# Altium PCB VNA_CHANNEL3.PcbDoc (part 1 of 3)
Units mm, origin at the board's own origin, x right, y up, seen from the top; angles counter-clockwise.
Board outline 32.68 x 75 mm, 4 copper layers (Top Layer, GND, PWR, Bottom Layer), stack 0.758 mm thick; 209 components, 187 nets, 832 pads, 833 vias.
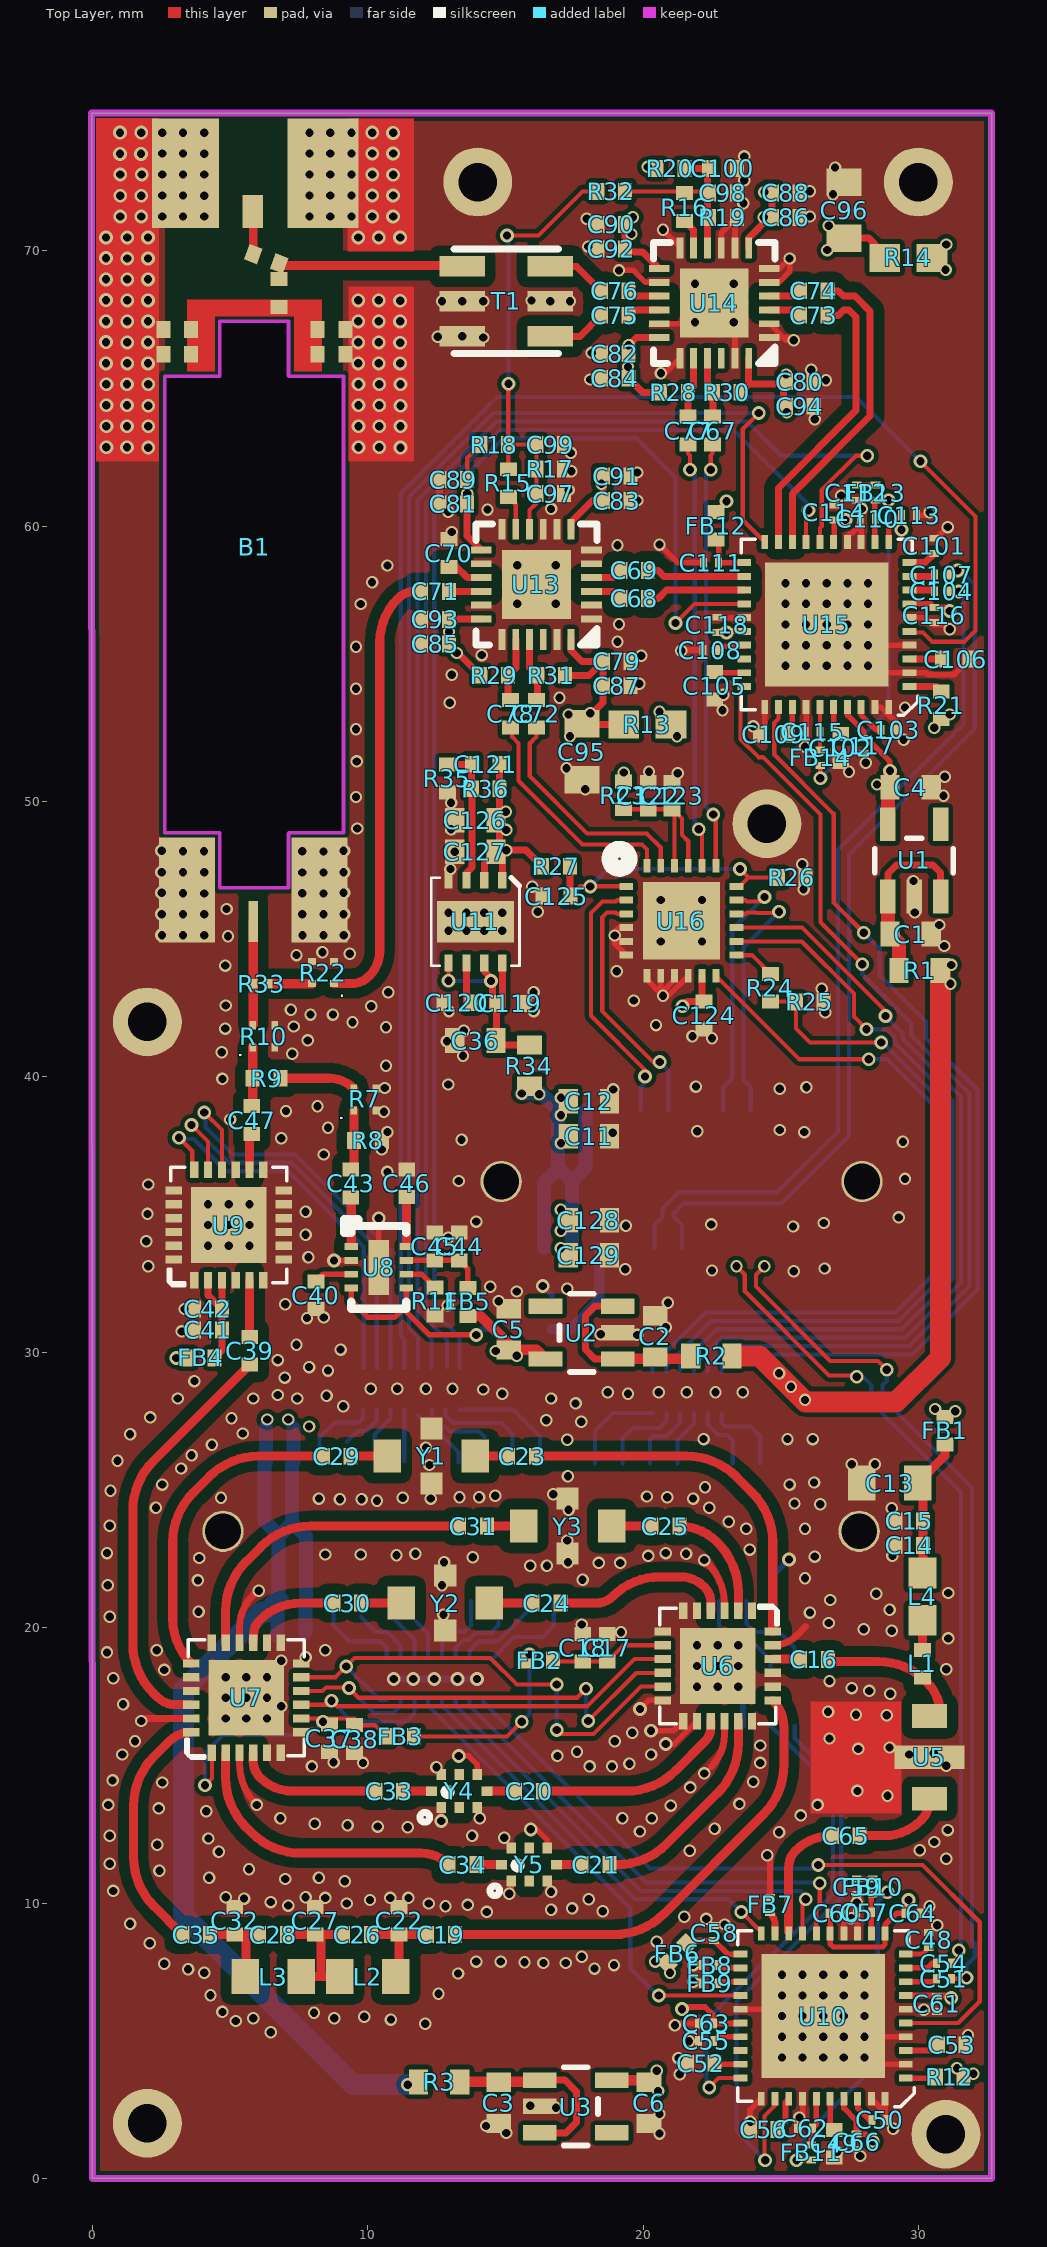
[diagram p0: Top Layer view]
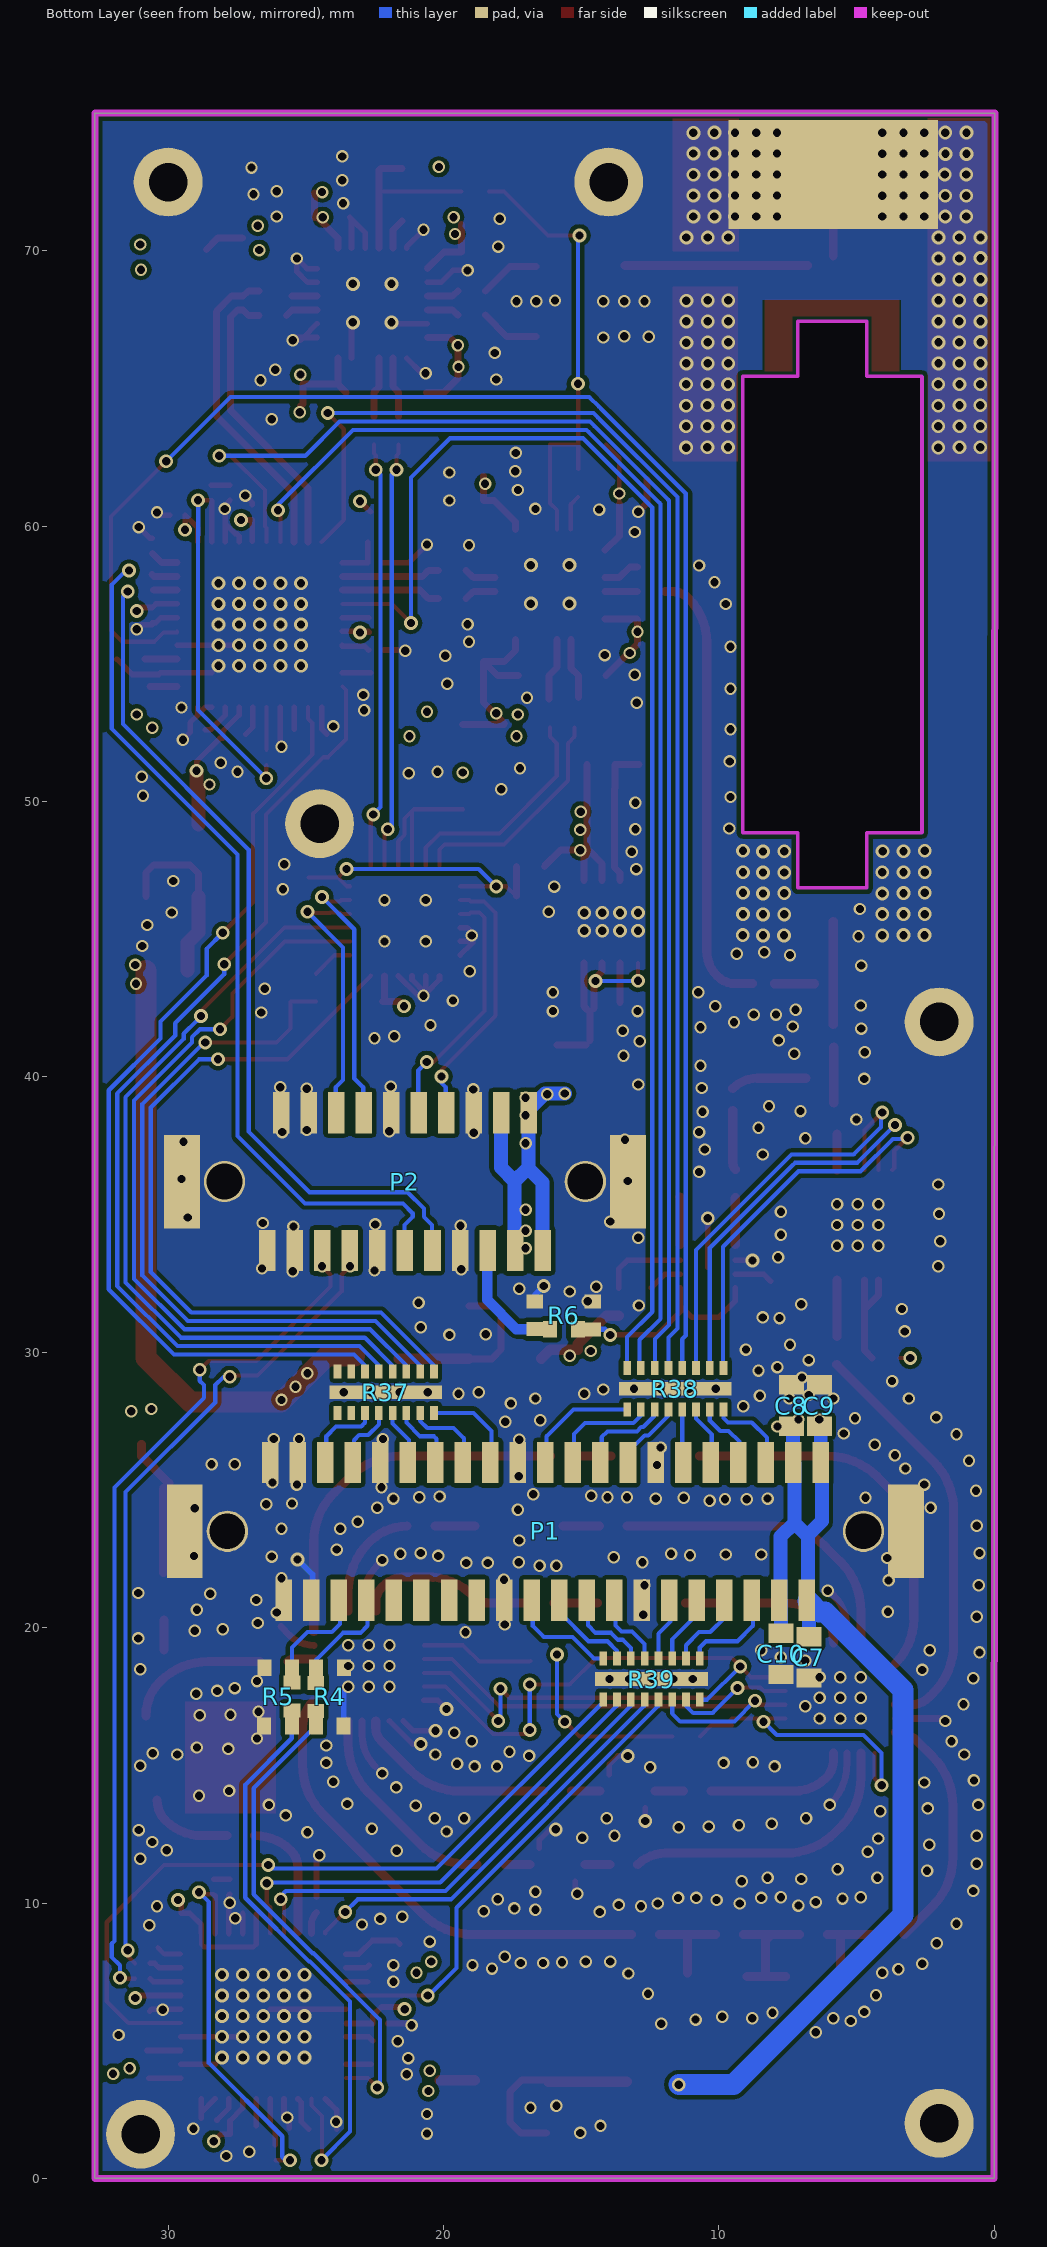
[diagram p1: Bottom Layer view, seen from below]
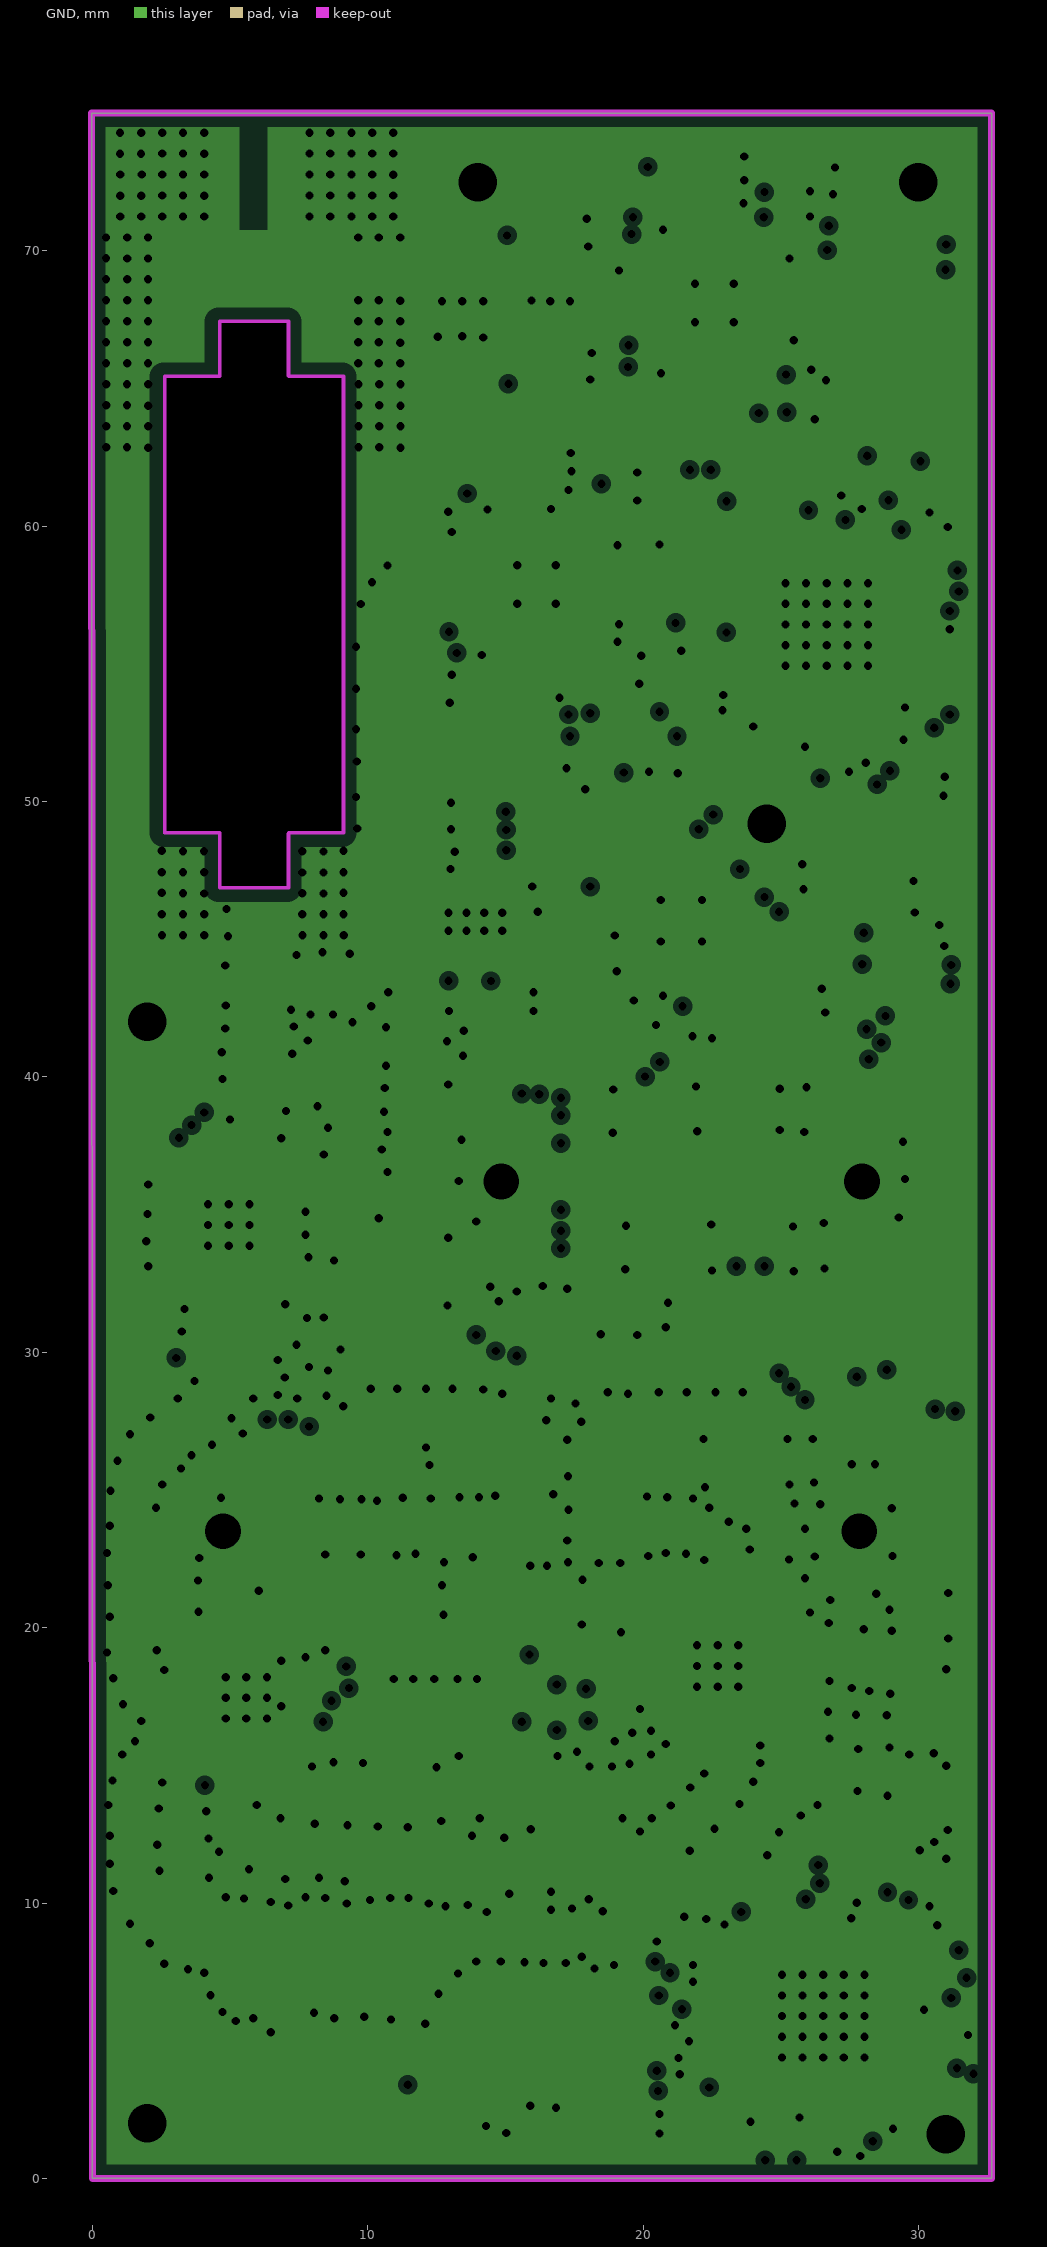
[diagram p2: GND, clearances drawn from the general rule]
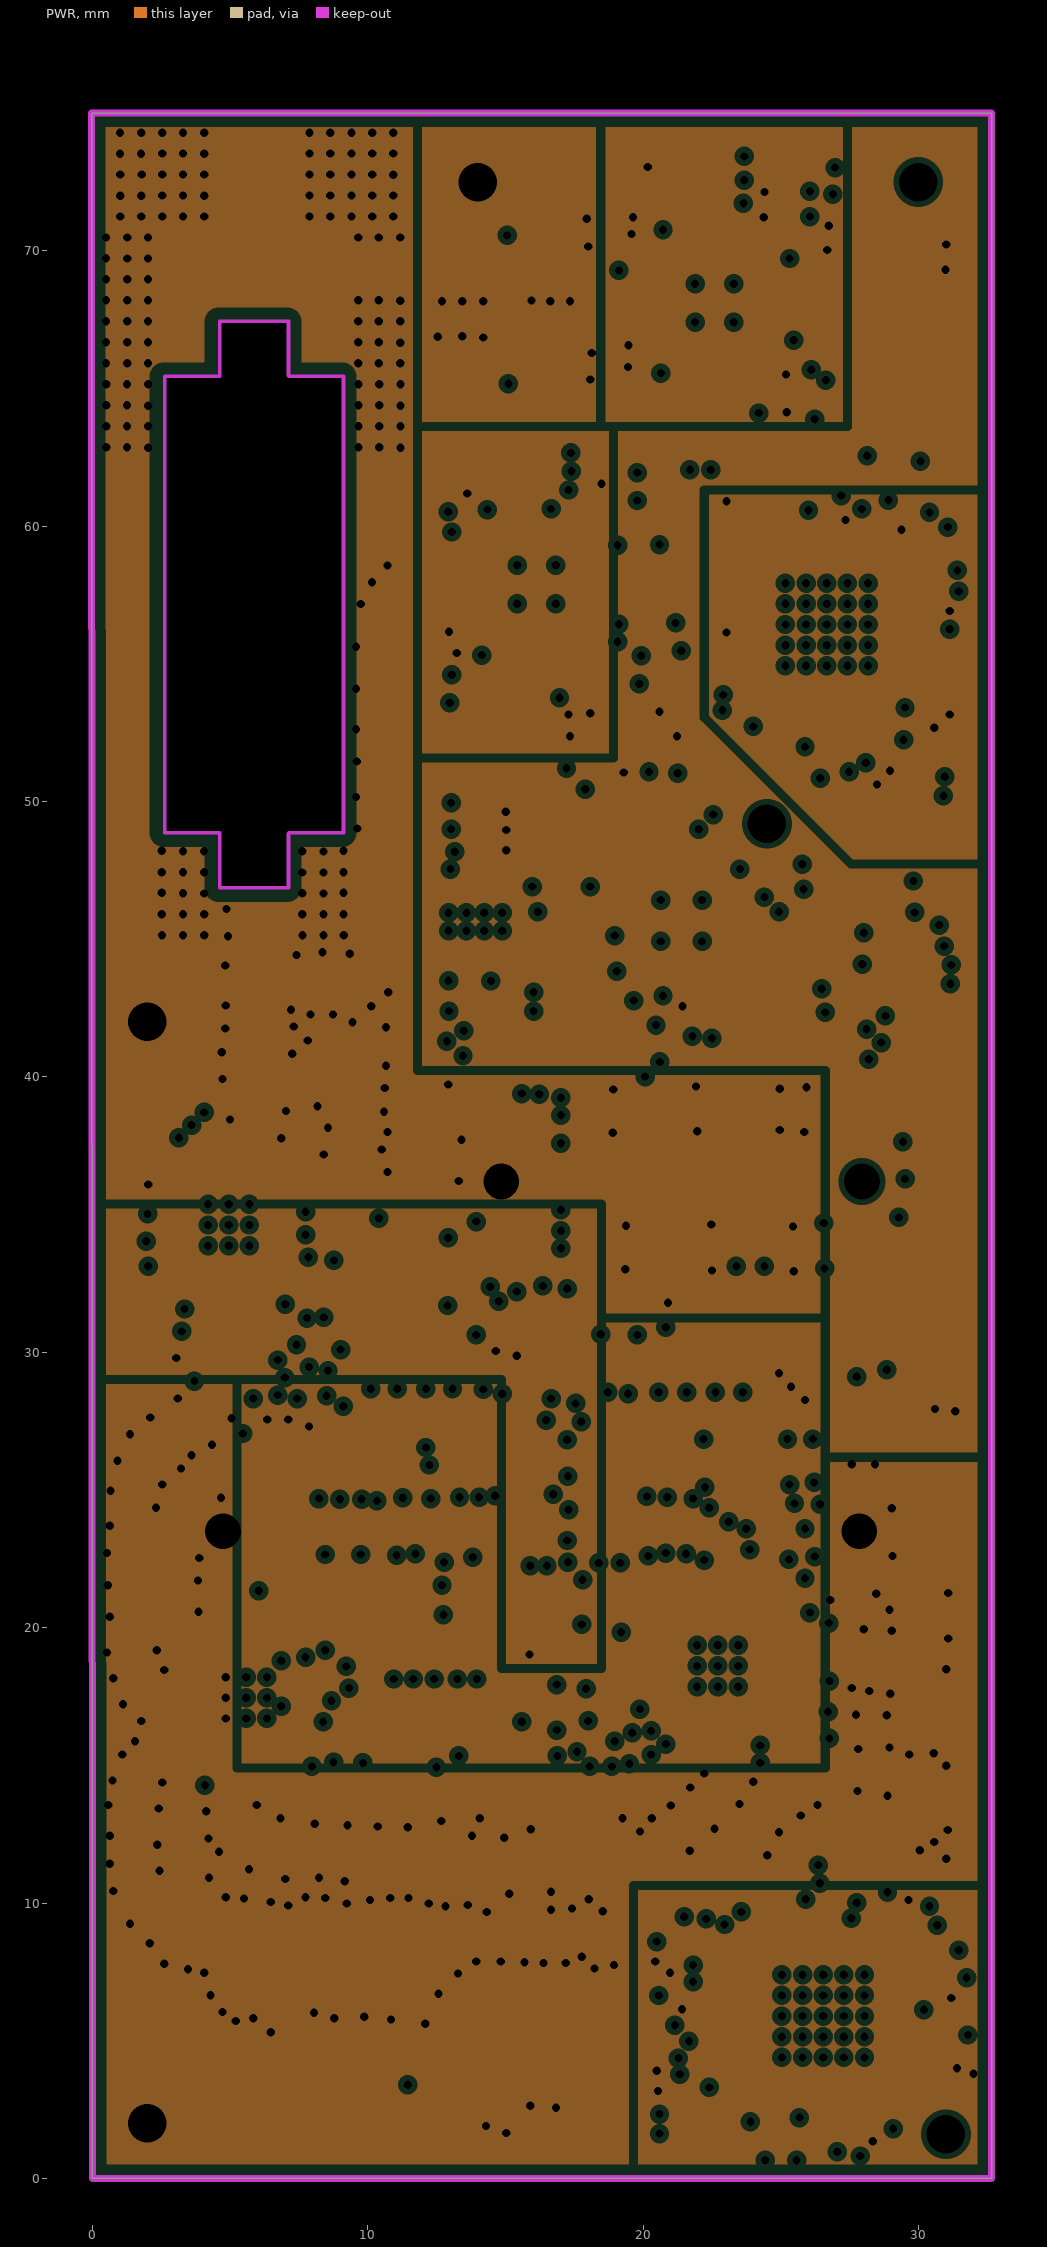
[diagram p3: PWR, clearances drawn from the general rule]

## Layer stack, top to bottom
Top Solder: solder mask 0.0102, Solder Resist, Dk 3.8
Top Layer: signal copper 0.0356
Dielectric 1: prepreg 0.1803, Dk 4.6
GND: plane copper 0.036, net GND
Dielectric 3: core 0.254, Dk 4.6
PWR: plane copper 0.036, net (Multiple Nets)
Dielectric 4: prepreg 0.1803, Dk 4.6
Bottom Layer: signal copper 0.0356
Bottom Solder: solder mask 0.0102, Solder Resist, Dk 3.8

## Board outline
0,0 -0.025,74.999 -0.009,74.999 32.659,74.999 32.659,0

## Design rules (kind name [scope] priority, off if disabled: settings)
Clearance 50R [InNetClass('50R') vs InPolygon] p1: gap=0.381 ignorepadtopadclearanceinfootprint=FALSE
Clearance [All] p2: gap=0.152 ignorepadtopadclearanceinfootprint=FALSE except(0: Arc-Hole Track-Hole SMDPad-Hole THPad-Hole Via-Hole Fill-Hole Poly-Hole Region-Hole Text-Hole)
DiffPairsRouting [All] p1: maxlimit=0.254 minlimit=0.254 mostfreqgap=0.254 toplayer_minwidth=0.152 toplayer_maxwidth=0.381 toplayer_prefwidth=0.381 bottomlayer_minwidth=0.152 bottomlayer_maxwidth=0.381 bottomlayer_prefwidth=0.381 maxuncoupledlength=12.7
MinimumSolderMaskSliver [All] p1 off: minsoldermaskwidth=0.254
PlaneClearance [All] p1: clearance=0.203
PlaneConnect [All] p1: planeconnectstyle=Direct reliefexpansion=0.508 reliefentries=4 reliefconductorwidth=0.254 reliefairgap=0.254
PolygonConnect [All] p1: connectstyle=Direct reliefconductorwidth=0.254 reliefentries=4 polygonreliefangle="90 Angle" airgapwidth=0.254
RoomDefinition source [InComponentClass('source')] p1 off: confinementstyle=ConfineIn formatcopy=TRUE lockcomponents=FALSE outline 37.244,116.767 197.111,116.767 197.111,126.292 37.244,126.292
RoomDefinition LO [InComponentClass('LO')] p2 off: confinementstyle=ConfineIn formatcopy=TRUE lockcomponents=FALSE outline 37.244,88.726 195.816,88.726 195.816,98.251 37.244,98.251
RoomDefinition IF_AMP [InComponentClass('IF_AMP')] p3 off: confinementstyle=ConfineIn formatcopy=TRUE lockcomponents=FALSE outline 37.244,79.378 100.515,79.378 100.515,87.456 37.244,87.456
RoomDefinition filterbank_amp [InComponentClass('filterbank_amp')] p4 off: confinementstyle=ConfineIn formatcopy=TRUE lockcomponents=FALSE outline 37.244,69.523 356.826,69.523 356.826,78.108 37.244,78.108
RoomDefinition bridge [InComponentClass('bridge')] p5 off: confinementstyle=ConfineIn formatcopy=TRUE lockcomponents=FALSE outline 37.244,28.604 117.838,28.604 117.838,36.478 37.244,36.478
RoomDefinition connector [InComponentClass('connector')] p6 off: confinementstyle=ConfineIn formatcopy=TRUE lockcomponents=FALSE outline 37.244,46.054 52.179,46.054 52.179,76.584 37.244,76.584
RoomDefinition mixer [InComponentClass('mixer')] p7 off: confinementstyle=ConfineIn formatcopy=TRUE lockcomponents=FALSE outline 26.144,64.57 258.554,64.57 258.554,73.46 26.144,73.46
RoomDefinition power [InComponentClass('power')] p8 off: confinementstyle=ConfineIn formatcopy=TRUE lockcomponents=FALSE outline 26.271,56.315 78.468,56.315 78.468,63.3 26.271,63.3
RoutingVias [All] p1: holewidth=0.305 width=0.508 viastyle="Through Hole" minholewidth=0.3 minwidth=0.45 maxholewidth=0.711 maxwidth=1.27
SilkToBoardRegionClearance [All] p1 off:
SilkToSilkClearance [All] p1 off: silktosilkclearance=0.254
SilkToSolderMaskClearance [IsPad] p1 off: minsilkscreentomaskgap=0.254 clearancetoexposedcopper=TRUE
SolderMaskExpansion [All] p1: expansion=0.102
Width [All] p1: maxlimit=1.524 minlimit=0.152 preferedwidth=0.152
23 further rules are at their usual default settings.

## Classes and differential pairs
component class power: C1 C2 C3 C4 C5 C6 C36 C119 C120 C121 C126 C127 R1 R2 R3 R34 R35 R36 U1 U2 U3 U11
component class connector: C7 C8 C9 C10 C11 C12 C128 C129 P1 P2 R4 R5 R6 R37 R38 R39
component class bridge: B1 R22 R33
component class filterbank_amp: C13 C14 C15 C16 C17 C18 C19 C20 C21 C22 C23 C24 C25 C26 C27 C28 C29 C30 C31 C32 C33 C34 C35 C37 C38 C39 C40 C41 C42 C43 C44 C45 C46 C47 FB1 FB2 FB3 FB4 FB5 L1 L2 L3 L4 R7 R8 R9 R10 R11 U5 U6 U7 U8 U9 Y1 Y2 Y3 Y4 Y5
component class IF_AMP: C122 C123 C124 C125 R23 R24 R25 R26 R27 U16
component class LO: C101 C102 C103 C104 C105 C106 C107 C108 C109 C110 C111 C112 C113 C114 C115 C116 C117 C118 FB12 FB13 FB14 R21 U15
component class mixer: C67 C68 C69 C70 C71 C72 C73 C74 C75 C76 C77 C78 C79 C80 C81 C82 C83 C84 C85 C86 C87 C88 C89 C90 C91 C92 C93 C94 C95 C96 C97 C98 C99 C100 R13 R14 R15 R16 R17 R18 R19 R20 R28 R29 R30 R31 R32 T1 U13 U14
component class source: C48 C49 C50 C51 C52 C53 C54 C55 C56 C57 C58 C59 C60 C61 C62 C63 C64 C65 C66 FB6 FB7 FB8 FB9 FB10 FB11 R12 U10
net class 50R: 250M 500M 900M 1800M 3600M 6000M dummy1 dummy2 dummy3 dummy4 LO1_N LO1_P LO2_N LO2_P NetB1_COUPLE NetB1_SOURCE NetC16_1 NetC16_2 NetC19_1 NetC19_2 NetC20_1 NetC20_2 NetC21_1 NetC21_2 NetC23_1 NetC23_2 NetC24_1 NetC24_2 NetC25_1 NetC25_2 NetC26_2 NetC28_2 NetC29_1 NetC30_1 NetC31_1 NetC33_1 NetC34_1 NetC39_1 NetC39_2 NetC43_1 NetC43_2 NetC47_1 NetC47_2 NetC65_1 NetC65_2 NetC68_2 NetC69_2 NetC70_2 NetC71_1 NetC71_2 NetC73_2 NetC74_2 NetC75_1 NetC75_2 NetC76_1 NetC76_2 NetR7_3 NetR22_3
differential pair REFL_IF_OUT: +REFL_IF_OUT_P -REFL_IF_OUT_N
differential pair REF_IF_OUT: +REF_IF_OUT_P -REF_IF_OUT_N
differential pair SOURCE_REF: +SOURCE_REF_P -SOURCE_REF_N
differential pair LO_REF: +LO_REF_P -LO_REF_N
differential pair LO2: +LO2_P -LO2_N
differential pair LO1: +LO1_P -LO1_N
differential pair REF_IF: +REF_IF_P -REF_IF_N
differential pair REFL_IF: +REFL_IF_P -REFL_IF_N

## Components (designator, comment, footprint, x,y, rotation, side; value= is the part's Value field where it differs from the comment)
B1 "BRIDGE" BRIDGE-3 4.055,48.2 r270 top
C1 "4.7uF" 0603L 29.718,45.187 r180 top
C2 "4.7uF" 0603L 20.447,30.582 r270 top
C3 "4.7uF" 0603L 14.757,2.743 r90 top
C4 "4.7uF" 0603L 29.718,50.521 r180 top
C5 "4.7uF" 0603L 15.121,30.836 r270 top
C6 "4.7uF" 0603L 20.218,2.743 r90 top
C7 "10uF" 0603L 6.731,18.923 r90 bottom
C8 "10uF" 0603L 7.366,28.067 r270 bottom
C9 "10uF" 0603L 6.35,28.067 r270 bottom
C10 "10uF" 0603L 7.747,19.05 r90 bottom
C11 "10uF" 0603L 18.034,37.846 r180 top
C12 "10uF" 0603L 18.034,39.116 r180 top
C13 "12nF" 0805 28.956,25.248 r0 top
C14 "1nF" 0402 29.667,22.987 r0 top
C15 "100pF" 0402 29.667,23.876 r0 top
C16 "1nF" 0402 26.213,18.847 r180 top
C17 "12nF" 0402 18.699,19.269 r90 top
C18 "12nF" 0402 17.81,19.269 r90 top
C19 "100pF" 0402 12.666,8.855 r180 top
C20 "100pF" 0402 15.866,14.062 r180 top
C21 "100pF" 0402 18.279,11.395 r180 top
C22 "100pF" 0402 11.142,9.363 r270 top
C23 "100pF" 0402 15.612,26.229 r180 top
C24 "100pF" 0402 16.501,20.895 r180 top
C25 "100pF" 0402 20.819,23.689 r180 top
C26 "100pF" 0402 9.618,8.855 r180 top
C27 "100pF" 0402 8.094,9.363 r270 top
C28 "100pF" 0402 6.57,8.855 r180 top
C29 "100pF" 0402 8.881,26.229 r180 top
C30 "100pF" 0402 9.262,20.895 r180 top
C31 "100pF" 0402 13.834,23.689 r180 top
C32 "100pF" 0402 5.173,9.363 r270 top
C33 "100pF" 0402 10.786,14.062 r180 top
C34 "100pF" 0402 13.453,11.395 r180 top
C35 "100pF" 0402 3.776,8.855 r180 top
C36 "2.2uF" 0603L 13.914,41.321 r0 top
C37 "12nF" 0402 8.61,15.977 r90 top
C38 "12nF" 0402 9.525,15.951 r90 top
C39 "1nF" 0402 5.718,30.051 r90 top
C40 "NC/1nF" 0402 8.119,32.071 r90 top
C41 "12nF" 0402 4.194,30.813 r0 top
C42 "12nF" 0402 4.194,31.575 r0 top
C43 "1nF" 0402 9.389,36.135 r270 top
C44 "1nF" 0402 13.326,33.849 r270 top
C45 "1nF" 0402 12.437,33.849 r270 top
C46 "1nF" 0402 11.421,36.135 r90 top
C47 "12nF" 0402 5.791,38.43 r90 top
C48 "1uF" 0201 30.378,8.661 r270 top
C49 "10uF" 0402 26.941,1.257 r90 top
C50 "10nF" 0201 28.592,2.121 r180 top
C51 "0.1uF" 0201 30.929,7.252 r180 top
C52 "10uF" 0402 22.09,4.178 r0 top
C53 "0.47uF" 0402 31.216,4.851 r180 top
C54 "0.1uF" 0201 30.929,7.811 r180 top
C55 "0.1uF" 0201 22.293,4.991 r0 top
C56 "10uF" 0402 24.384,1.778 r0 top
C57 "NC" 0201 28.034,9.665 r180 top
C58 "1uF" 0201 22.58,8.915 r90 top
C59 "15nF" 0201 27.762,10.592 r270 top
C60 "1uF" 0201 27.025,9.627 r0 top
C61 "1uF" 0201 30.675,6.337 r270 top
C62 "2.2nF" 0201 25.875,1.816 r180 top
C63 "1uF" 0201 22.293,5.626 r180 top
C64 "1uF" 0201 29.794,9.627 r0 top
C65 "1nF" 0402 27.356,12.446 r0 top
C66 "1uF" 0201 27.754,1.334 r270 top
C67 "1nF" 0402 22.525,63.469 r90 top
C68 "1nF" 0402 19.685,57.379 r180 top
C69 "1nF" 0402 19.685,58.395 r180 top
C70 "1nF" 0402 12.954,59.03 r270 top
C71 "1nF" 0402 12.446,57.633 r0 top
C72 "1nF" 0402 16.129,53.188 r90 top
C73 "1nF" 0402 26.208,67.66 r180 top
C74 "1nF" 0402 26.208,68.549 r180 top
C75 "1nF" 0402 18.974,67.666 r0 top
C76 "1nF" 0402 18.969,68.549 r0 top
C77 "1nF" 0402 21.636,63.469 r90 top
C78 "1nF" 0402 15.189,53.188 r90 top
C79 "0.1uF" 0402 19.05,55.093 r180 top
C80 "0.1uF" 0402 25.7,65.247 r180 top
C81 "0.1uF" 0402 13.106,60.808 r0 top
C82 "0.1uF" 0402 18.969,66.263 r0 top
C83 "0.1uF" 0402 19.05,60.935 r180 top
C84 "0.1uF" 0402 18.969,65.374 r0 top
C85 "0.1uF" 0402 12.446,55.728 r0 top
C86 "0.1uF" 0402 25.192,71.216 r180 top
C87 "10nF" 0402 19.05,54.204 r180 top
C88 "10nF" 0402 25.192,72.105 r180 top
C89 "10nF" 0402 13.106,61.697 r0 top
C90 "10nF" 0402 18.842,70.962 r0 top
C91 "10nF" 0402 19.05,61.824 r180 top
C92 "10nF" 0402 18.842,70.073 r0 top
C93 "10nF" 0402 12.446,56.617 r0 top
C94 "10nF" 0402 25.7,64.358 r180 top
C95 "10uF" 0805 17.78,51.816 r90 top
C96 "10uF" 0805 27.305,71.476 r270 top
C97 "0.1uF" 0402 16.637,61.189 r180 top
C98 "0.1uF" 0402 22.906,72.105 r180 top
C99 "100pF" 0402 16.637,62.967 r180 top
C100 "100pF" 0402 22.906,72.994 r180 top
C101 "1uF" 0201 30.575,59.288 r270 top
C102 "10uF" 0402 27.178,51.943 r90 top
C103 "10nF" 0201 28.924,52.608 r180 top
C104 "0.1uF" 0201 30.855,57.637 r180 top
C105 "10uF" 0402 22.606,54.204 r90 top
C106 "0.47uF" 0402 31.363,55.174 r180 top
C107 "0.1uF" 0201 30.855,58.247 r180 top
C108 "0.1uF" 0201 22.447,55.504 r0 top
C109 "10uF" 0402 24.739,52.451 r0 top
C110 "NC" 0201 28.162,60.279 r180 top
C111 "1uF" 0201 22.473,58.679 r180 top
C112 "15nF" 0201 27.756,61.219 r270 top
C113 "1uF" 0201 29.661,60.406 r0 top
C114 "1uF" 0201 26.949,60.503 r90 top
C115 "2.2nF" 0201 26.156,52.532 r180 top
C116 "1uF" 0201 30.575,56.774 r270 top
C117 "1uF" 0201 28.01,52.024 r270 top
C118 "1uF" 0201 22.701,56.418 r90 top
C119 "0.1uF" 0402 15.189,42.672 r180 top
C120 "470nF" 0402 13.259,42.697 r0 top
C121 "470nF" 0402 14.295,51.354 r180 top
C122 "12nF" 0402 20.193,50.216 r270 top
C123 "12nF" 0402 21.056,50.216 r270 top
C124 "12nF" 0402 22.216,42.231 r90 top
C125 "12nF" 0402 16.856,46.567 r0 top
C126 "0.1uF" 0603L 13.914,49.322 r0 top
C127 "2.2uF" 0603L 13.914,48.179 r0 top
C128 "10uF" 0603L 18.034,34.798 r180 top
C129 "10uF" 0603L 18.034,33.528 r180 top
FB1 "FB" 0402 30.962,27.153 r270 top
FB2 "FB" 0402 16.23,18.821 r180 top
FB3 "FB" 0402 11.176,16.053 r0 top
FB4 "FB" 0402 3.94,29.797 r180 top
FB5 "FB" 0402 13.64,31.826 r90 top
FB6 "FB" 0402 21.234,8.153 r45 top
FB7 "50" 0201 24.612,9.931 r270 top
FB8 "50" 0201 22.428,7.747 r0 top
FB9 "50" 0201 22.428,7.087 r0 top
FB10 "330" 0201 28.346,10.592 r270 top
FB11 "0R" 0201 26.111,0.94 r270 top
FB12 "FB" 0402 22.651,60.025 r270 top
FB13 "330" 0201 28.442,61.219 r270 top
FB14 "0R" 0201 26.435,51.592 r270 top
L1 "Inductor" 0402 30.15,18.694 r270 top value=10nH
L2 "0R" 0805 9.999,7.331 r180 top
L3 "0R" 0805 6.57,7.331 r180 top
L4 "Inductor" 0603 30.15,21.133 r270 top value=10nH
P1 "DF9-41S" DF9-41S 16.3,23.5 r0 bottom
P2 "DF9-21" DF9-21S 21.4,36.2 r180 bottom
R1 "FB" 0603L 30.048,43.866 r0 top value=0Ohm
R2 "FB" 0603L 22.479,29.87 r0 top value=0Ohm
R3 "FB" 0603L 12.598,3.505 r180 top value=0Ohm
R4 "PiFilter" PiFIiter 24.638,17.475 r90 bottom
R5 "PiFilter" PiFIiter 25.501,17.501 r270 bottom
R6 "PiFilter" PiFIiter 15.621,30.836 r0 bottom
R7 "EXB24-RF-ATT" EXB24AT-RF-ATT 9.897,39.183 r90 top
R8 "53R" 0402 10.007,37.694 r0 top
R9 "200R" 0402 6.324,39.954 r0 top
R10 "EXB24-RF-ATT" EXB24AT-RF-ATT 6.226,41.481 r90 top
R11 "240" 0402 12.446,31.852 r270 top
R12 "10k" 0402 31.14,3.683 r180 top
R13 "FB" 0603 20.167,52.807 r180 top value=0Ohm
R14 "FB" 0603 29.642,69.748 r180 top value=0Ohm
R15 "NC" 0402 15.113,61.57 r270 top
R16 "NC" 0402 21.509,71.597 r270 top
R17 "NC" 0402 16.637,62.078 r180 top
R18 "NC" 0402 14.605,62.967 r180 top
R19 "NC" 0402 22.906,71.216 r180 top
R20 "NC" 0402 21.001,72.994 r180 top
R21 "10k" 0402 30.829,53.497 r90 top
R22 "EXB24-RF-ATT" EXB24AT-RF-ATT 8.382,43.79 r180 top
R23 "200R" 0402 19.295,50.232 r270 top
R24 "200R" 0402 24.629,43.247 r270 top
R25 "500R" 0402 26.06,42.723 r180 top
R26 "200R" 0402 25.4,47.244 r0 top
R27 "200R" 0402 16.84,47.65 r0 top
R28 "50R" 0402 21.128,64.866 r180 top
R29 "50R" 0402 14.605,54.585 r180 top
R30 "50R" 0402 23.033,64.866 r0 top
R31 "50R" 0402 16.662,54.585 r0 top
R32 "0R" 0402 18.847,72.161 r0 top
R33 "200" 0201 6.147,43.383 r180 top
R34 "FB" 0603L 15.875,40.411 r270 top value=0Ohm
R35 "10k" 0402 12.898,50.846 r270 top value=0Ohm
R36 "6.25k" 0402 14.295,50.465 r180 top value=0Ohm
R37 "NUF8xxx" NUF8xxx 22.098,28.55 r0 bottom
R38 "NUF8xxx" NUF8xxx 11.582,28.677 r0 bottom
R39 "NUF8xxx" NUF8xxx 12.446,18.136 r0 bottom
T1 "TCM1-63AX+" TCM1-63AX+ 15.032,68.168 r90 top
U1 "RT9013-28GB" SOT23-5 29.845,47.854 r0 top
U2 "RT9013-28GB" SOT23-5 17.78,30.709 r90 top
U3 "RT9013-28GB" SOT23-5 17.551,2.616 r270 top
U5 "AMP-SOT89" SOT-89 30.404,15.291 r90 top
U6 "PE42462" PE42462 22.712,18.609 r270 top
U7 "PE42462" PE42462 5.592,17.452 r90 top
U8 "AD8319" AD8319 10.405,33.087 r270 top
U9 "PE43711" PE43711 4.956,34.623 r90 top
U10 "LMX2572" LMX2572 26.544,5.893 r180 top
U11 "TPS7A8101" TPS7A8101 13.914,45.639 r270 top
U13 "ADL5801" ADL5801 16.129,57.887 r180 top
U14 "ADL5801" ADL5801 22.59,68.106 r180 top
U15 "LMX2572" LMX2572 26.673,56.431 r180 top
U16 "HMC960" HMC960 21.394,45.673 r0 top
Y1 "1748LP18A075" 1748LP18A075 12.31,26.229 r180 top
Y2 "LFCN-6000" 1748LP18A075 12.818,20.895 r180 top
Y3 "LFCN-3400" 1748LP18A075 17.263,23.689 r180 top
Y4 "0868LP15A020" 5515LP15A730/0868LP15A020 13.326,14.062 r0 top
Y5 "0500LP15A020" 5515LP15A730/0868LP15A020 15.866,11.395 r0 top

## Footprints (in the part's own frame and the unit in brackets; to place one, negate y for a bottom-side part, rotate by r counter-clockwise, add the part's x,y. Pads: shape width x height; smd on the part's side, far side on the other; paste and mask are expansions set on the pad)
0201 [mm]
  rect 0.25x0.35 smd: 1(-0.275,0) 2(0.275,0)
  body extent -0.3,-0.15 0.3,0.15, height 0.23
0402 [mil] "0402-RES"
  rect 20x24 smd: 1(-19.68,0) 2(20,0)
0603 [mil] "0603-RES"
  rect 44x40 smd: 1(-33.46,0) 2(34,0)
  body extent -31,-16 31,16, height 31
0603L [mm]
  rect 0.7x0.9 smd: 1(-0.75,0) 2(0.75,0)
  body extent -0.8,-0.4 0.8,0.4, height 0.8
0805 [mm]
  rect 1x1.27 smd: 1(-1.016,0) 2(1.016,0)
  body extent -1.27,-0.76 1.27,0.76, height 0.8
1748LP18A075 [mm]
  rect 1x1.2 smd: 1(-1.6,0) 2(1.6,0)
  rect 0.8x0.8 smd: 3(0,-1) 4(0,1)
  body extent -1.6,-0.8 1.6,0.8, height 1
5515LP15A730/0868LP15A020 [mm]
  rect 0.35x0.4 smd: 1(-0.65,-0.6) 2(0,-0.6) 3(0.65,-0.6) 5(0.65,0.6) 6(0,0.6) 7(-0.65,0.6)
  rect 0.4x0.35 smd: 4(1,0) 8(-1,0)
  silkscreen extent -1.42,-1.12 -0.3,0.1, body extent -1,-0.6 1,0.6, height 0.85
AD8319 [mm]
  rect 2x0.75 smd: 0(0,0)
  rect 0.25x0.5 smd: 1(-0.75,-1) 2(-0.25,-1) 3(0.25,-1) 4(0.75,-1) 5(0.75,1) 6(0.25,1) 7(-0.25,1) 8(-0.75,1)
  silkscreen extent -1.75,-1.25 1.5,1, body extent -1.5,-1 1.5,1, height 0.75
ADL5801 [mm]
  rect 2.5x2.5 smd: 0(0,0)
  rect 0.75x0.25 smd: 1(-2,1.25) 2(-2,0.75) 3(-2,0.25) 4(-2,-0.25) 5(-2,-0.75) 6(-2,-1.25) 13(2,-1.25) 14(2,-0.75) 15(2,-0.25) 16(2,0.25) 17(2,0.75) 18(2,1.25)
  rect 0.25x0.75 smd: 7(-1.25,-2) 8(-0.75,-2) 9(-0.25,-2) 10(0.25,-2) 11(0.75,-2) 12(1.25,-2) 19(1.25,2) 20(0.75,2) 21(0.25,2) 22(-0.25,2) 23(-0.75,2) 24(-1.25,2)
  silkscreen extent -2.2,-2.2 2.2,2.2, body extent -2,-2 2,2, height 0.85
BRIDGE-3 [mil]
  rect 20x24 smd: 2(-778.39,107.28) COUPLE(-818.07,107.28)
  rect 24x20 smd: 2(-745.91,-18.39) 2(-745.91,162.4) 2(-710.47,162.4) 2(-710.47,-18.39) GND(-745.91,-58.07) GND(-745.91,202.09) GND(-710.47,202.09) GND(-710.47,-58.07)
  rect 20x24 smd rot 70: COUPLE(-840.44,107.47) OUT(-853.71,70.35)
  rect 156x95.5 smd: GND(-969.33,-26.57)
  rect 156x101 smd: GND(-969.33,170.28)
  rect 156x300 smd far side: GND(-967.44,70.47)
  rect 150x80 smd: GND(55.47,165.47) GND(55.47,-24.53)
  rect 47.24x29.53 smd: OUT(-914.37,69.88)
  rect 59.06x13 smd: SOURCE(100.47,70.47)
  Top Layer region: -557.44,-63.98 -1048.07,-63.98 -1048.07,-154.53 -557.44,-154.53
  Top Layer region: -807.44,206.69 -557.44,206.69 -557.44,300.47 -807.44,300.47
  Top Layer region: -1047.44,205.47 -857.44,205.47 -857.44,300.47 -1047.44,300.47
  Top Layer pour cut-out: -678.98,199.8 -679.78,199 -1047,199 -1047,-56.1 -1040.2,-56.1 -678.98,-56.1
  Top Layer region: -685.87,128.94 -764.61,128.94 -764.61,15.75 -685.87,15.75 -685.87,-23.62 -788.23,-23.62 -788.23,168.31 -685.87,168.31
  Top Layer lines w12: -850.71,70.35 -893.7,70.35
  GND region: -888.78,90.55 -1048.78,90.55 -1048.78,51.18 -888.78,51.18
  Keep-Out Layer board cut-out: -25.91,-57.86 -25.91,20.88 52.83,20.88 52.83,119.31 -25.91,119.31 -25.91,198.05 -678.7,198.05 -678.7,119.31 -757.44,119.31 -757.44,20.88 -678.7,20.88 -678.7,-57.86
  Keep-Out Layer lines w5: -26.18,-56.1 -678.98,-56.1 -678.98,22.64 -757.72,22.64 -757.72,121.06 -678.98,121.06 -678.98,199.8 -26.18,199.8 -26.18,121.06 52.56,121.06 52.56,22.64 -26.18,22.64 -26.18,-56.1
DF9-21S [mm]
  rect 1.3x3.4 smd: 0(-8.1,0) 0(8.1,0)
  round 1.5 hole 1.3: 0(-6.55,0) 0(6.55,0)
  rect 0.6x1.5 smd: 1(-5,-2.5) 2(-4,-2.5) 3(-3,-2.5) 4(-2,-2.5) 5(-1,-2.5) 6(0,-2.5) 7(1,-2.5) 8(2,-2.5) 9(3,-2.5) 10(4,-2.5) 11(5,-2.5) 12(4.5,2.5) 13(3.5,2.5) 14(2.5,2.5) 15(1.5,2.5) 16(0.5,2.5) 17(-0.5,2.5) 18(-1.5,2.5) 19(-2.5,2.5) 20(-3.5,2.5) 21(-4.5,2.5)
  body extent -8.05,-2.79 8.05,2.81, height 3.3
DF9-41S [mm]
  rect 1.3x3.4 smd: 0(-13.1,0) 0(13.1,0)
  round 1.5 hole 1.3: 0(-11.55,0) 0(11.55,0)
  rect 0.6x1.5 smd: 1(-10,-2.5) 2(-9,-2.5) 3(-8,-2.5) 4(-7,-2.5) 5(-6,-2.5) 6(-5,-2.5) 7(-4,-2.5) 8(-3,-2.5) 9(-2,-2.5) 10(-1,-2.5) 11(0,-2.5) 12(1,-2.5) 13(2,-2.5) 14(3,-2.5) 15(4,-2.5) 16(5,-2.5) 17(6,-2.5) 18(7,-2.5) 19(8,-2.5) 20(9,-2.5) 21(10,-2.5) 22(9.5,2.5) 23(8.5,2.5) 24(7.5,2.5) 25(6.5,2.5) 26(5.5,2.5) 27(4.5,2.5) 28(3.5,2.5) 29(2.5,2.5) 30(1.5,2.5) 31(0.5,2.5) 32(-0.5,2.5) 33(-1.5,2.5) 34(-2.5,2.5) 35(-3.5,2.5) 36(-4.5,2.5) 37(-5.5,2.5) 38(-6.5,2.5) 39(-7.5,2.5) 40(-8.5,2.5) 41(-9.5,2.5)
  body extent -13.05,-2.81 13.05,2.79, height 3.3
EXB24AT-RF-ATT [mm]
  rect 0.3x0.25 smd: 1(-0.4,-0.4) 2(0.4,-0.4) 3(0.4,0.4) 4(-0.4,0.4)
  body extent -0.5,-0.5 0.5,0.5, height 0.35
HMC960 [mm]
  rect 2.8x2.8 smd: 0(0,0)
  rect 0.5x0.25 smd: 1(-2,1.25) 2(-2,0.75) 3(-2,0.25) 4(-2,-0.25) 5(-2,-0.75) 6(-2,-1.25) 13(2,-1.25) 14(2,-0.75) 15(2,-0.25) 16(2,0.25) 17(2,0.75) 18(2,1.25)
  rect 0.25x0.5 smd: 7(-1.25,-2) 8(-0.75,-2) 9(-0.25,-2) 10(0.25,-2) 11(0.75,-2) 12(1.25,-2) 19(1.25,2) 20(0.75,2) 21(0.25,2) 22(-0.25,2) 23(-0.75,2) 24(-1.25,2)
  silkscreen extent -2.6,1.9 -1.9,2.6, body extent -2,-2 2,2, height 0.9
LMX2572 [mm]
  rect 4.5x4.5 smd: 0(0,0)
  rect 0.5x0.25 smd: 1(-3,2.25) 2(-3,1.75) 3(-3,1.25) 4(-3,0.75) 5(-3,0.25) 6(-3,-0.25) 7(-3,-0.75) 8(-3,-1.25) 9(-3,-1.75) 10(-3,-2.25) 21(3,-2.25) 22(3,-1.75) 23(3,-1.25) 24(3,-0.75) 25(3,-0.25) 26(3,0.25) 27(3,0.75) 28(3,1.25) 29(3,1.75) 30(3,2.25)
  rect 0.25x0.5 smd: 11(-2.25,-3) 12(-1.75,-3) 13(-1.25,-3) 14(-0.75,-3) 15(-0.25,-3) 16(0.25,-3) 17(0.75,-3) 18(1.25,-3) 19(1.75,-3) 20(2.25,-3) 31(2.25,3) 32(1.75,3) 33(1.25,3) 34(0.75,3) 35(0.25,3) 36(-0.25,3) 37(-0.75,3) 38(-1.25,3) 39(-1.75,3) 40(-2.25,3)
  silkscreen extent -3.3,-3.1 3.1,3.3, body extent -3,-3 3,3, height 1
NUF8xxx [mm]
  rect 4.1x0.5 smd: 0(0,0)
  rect 0.28x0.51 smd: 1(-1.75,-0.75) 2(-1.25,-0.75) 3(-0.75,-0.75) 4(-0.25,-0.75) 5(0.25,-0.75) 6(0.75,-0.75) 7(1.25,-0.75) 8(1.75,-0.75) 9(1.75,0.75) 10(1.25,0.75) 11(0.75,0.75) 12(0.25,0.75) 13(-0.25,0.75) 14(-0.75,0.75) 15(-1.25,0.75) 16(-1.75,0.75)
  body extent -2,-0.8 2,0.8, height 0.9
PE42462 [mm]
  rect 2.75x2.75 smd: 0(0,0)
  rect 0.6x0.3 smd: 1(-2,1.25) 2(-2,0.75) 3(-2,0.25) 4(-2,-0.25) 5(-2,-0.75) 6(-2,-1.25) 13(2,-1.25) 14(2,-0.75) 15(2,-0.25) 16(2,0.25) 17(2,0.75) 18(2,1.25)
  rect 0.3x0.6 smd: 7(-1.25,-2) 8(-0.75,-2) 9(-0.25,-2) 10(0.25,-2) 11(0.75,-2) 12(1.25,-2) 19(1.25,2) 20(0.75,2) 21(0.25,2) 22(-0.25,2) 23(-0.75,2) 24(-1.25,2)
  silkscreen extent -2.2,-2.1 2.1,2.2, body extent -2,-2 2,2, height 0.85
PE43711 [mm]
  rect 2.75x2.75 smd: 0(0,0)
  rect 0.6x0.3 smd: 1(-2,1.25) 2(-2,0.75) 3(-2,0.25) 4(-2,-0.25) 5(-2,-0.75) 6(-2,-1.25) 13(2,-1.25) 14(2,-0.75) 15(2,-0.25) 16(2,0.25) 17(2,0.75) 18(2,1.25)
  rect 0.3x0.6 smd: 7(-1.25,-2) 8(-0.75,-2) 9(-0.25,-2) 10(0.25,-2) 11(0.75,-2) 12(1.25,-2) 19(1.25,2) 20(0.75,2) 21(0.25,2) 22(-0.25,2) 23(-0.75,2) 24(-1.25,2)
  silkscreen extent -2.2,-2.1 2.1,2.2, body extent -2,-2 2,2, height 0.85
PiFIiter [mil]
  rect 24x20 smd: 1(-41,0) 2(42,-0.31) 3(-41,-39.68) 3(42,-40)
  rect 20x24 smd: 1(-19.69,0) 2(20,0)
SOT23-5 [mil] "SOT23-5"
  rect 22x48 smd: 1(-37.4,-51.19) 2(0,-51.19) 3(38,-51.19) 4(38,52) 5(-37.4,52)
  silkscreen extent -56,-17 56,32, body extent -57,-55 57,55, height 47
SOT-89 [mil]
  rect 34x50 smd: 1(-59.06,0) 3(59.06,0)
  rect 34x100 smd: 2(0,0)
  Top Layer region: -80,40 80,40 80,170 -80,170
  body extent -89,-22 89,147, height 59
TCM1-63AX+ [mm]
  rect 0.75x1.65 smd: 1(-1.27,1.6) 2(0,1.6) 3(1.27,1.6) 4(1.27,-1.6) 5(0,-1.6) 6(-1.27,-1.6)
  silkscreen extent -1.9,-1.9 1.9,1.9
TPS7A8101 [mm]
  rect 1.5x2.8 smd: 0(0,0)
  rect 0.6x0.3 smd: 1(-1.5,0.975) 2(-1.5,0.325) 3(-1.5,-0.325) 4(-1.5,-0.975) 5(1.5,-0.975) 6(1.5,-0.325) 7(1.5,0.325) 8(1.5,0.975)
  silkscreen extent -1.6,-1.6 1.6,1.6, body extent -1.5,-1.5 1.5,1.5, height 0.6

## Part data
C1 C2 C3 C4 C5 C6 C40 C43 C44 C45 C46 C95 C96 C121: library part Cap, "Capacitor", LatestRevisionDate=17-Jul-2002, LatestRevisionNote="Re-released for DXP Platform.", PackageDescription="Radial Cap, Thru-Hole; 2 Leads; 0.3 in Pin Spacing", PackageReference=RAD-0.3, Published=8-Jun-2000, Publisher="Altium Limited"
C7 C8 C9 C10 C11 C12 C13 C14 C15 C16 C17 C18 C19 C20 C21 C22 C23 C24 C25 C26 C27 C28 C29 C30 C31 C32 C33 C34 C35 C36 C37 C38 C39 C41 C42 C47 C48 C49 C50 C51 C52 C53 C54 C55 C56 C57 C58 C59 C60 C61 C62 C63 C64 C65 C66 C67 C68 C69 C70 C71 C72 C73 C74 C75 C76 C77 C78 C79 C80 C81 C82 C83 C84 C85 C86 C87 C88 C89 C90 C91 C92 C93 C94 C97 C98 C99 C100 C101 C102 C103 C104 C105 C106 C107 C108 C109 C110 C111 C112 C113 C114 C115 C116 C117 C118 C119 C120 C122 C123 C124 C125 C126 C127 C128 C129: library part CAP0402-CAP, "<b>Capacitor</b> / Standard 0603 ceramic capacitor, and 0.1\" leaded capacitor.", PARTNO=CC0402ZRY5V7BB104
FB1 FB2 FB3 FB4 FB5 FB6 FB7 FB8 FB9 FB10 FB11 FB12 FB13 FB14 R1 R2 R3 R8 R9 R11 R12 R13 R14 R15 R16 R17 R18 R19 R20 R21 R23 R24 R25 R26 R27 R28 R29 R30 R31 R32 R33 R34 R35 R36: library part Res2, "Resistor", LatestRevisionDate=17-Jul-2002, LatestRevisionNote="Re-released for DXP Platform.", PackageDescription="Axial Device, Thru-Hole; 2 Leads; 0.4 in Pin Spacing", PackageReference=AXIAL-0.4, Published=8-Jun-2000, Publisher="Altium Limited"
L2 L3: library part L/2.5*2.0
U1 U2 U3: library part LP5907
Y2 Y3: library part 1748LP18A075
Y4 Y5: library part 5515LP15A730/0868LP15A020
L1 L4: Code_IEC=1005, Code_JEITA=0402, LatestRevisionDate=29-May-2009, LatestRevisionNote="IPC-7351 Footprint Added.", PackageDescription="Chip Inductor", PackageReference=0402-A, Published=8-Jun-2000, Publisher="Altium Limited"

## Free pads (board coordinates)
  round 2.5 hole 1.4: 1(2,2) 1(2,42) 1(14,72.5) 1(24.5,49.2) 1(30,72.5) 1(31,1.6)

## Via types
v1: diameter 0.45, hole 0.3, Top Layer to Bottom Layer, tented both sides, 520 vias
v2: diameter 0.5, hole 0.3, Top Layer to Bottom Layer, tented both sides, 143 vias
v3: diameter 0.5, hole 0.305, Top Layer to Bottom Layer, tented both sides, 140 vias
v4: diameter 0.45, hole 0.3, Top Layer to Bottom Layer, 22 vias
v5: diameter 0.508, hole 0.305, Top Layer to Bottom Layer, tented both sides, 8 vias

## Nets (pads, with @x,y where several pads share a name; then routed paths per layer and width w, separated by ;. In a path a pad name is that pad's centre, name@x,y a point inside that pad or via, vN(x,y) a via of type N, cw(c..) or ccw(c..) an arc to the next point about the centre after c; other vN are vias at no path point)
3.3LO: C4.2 C113.1 C114.1 C116.1 C117.1 C118.1 FB12.1 R21.1 U1.5 U15.7 U15.11 U15.15 U15.26 U15.37 | length 11.1
  Top Layer w0.203: FB12.1@22.651,60.525 v2(23.035,60.909) ; C118.1@22.701,56.143 v2(23.028,56.143) ; C118.1@22.739,56.181 U15.26@23.673,56.181 ; U15.15@26.949,59.457 C114.1@26.949,60.228 v2(27.351,60.228) ; U15.37@27.423,53.431 27.423,53.146 28.01,52.559 C117.1@28.01,52.299 28.119,52.299 28.968,51.45 v2(28.968,51.117) ; U15.11@28.923,59.431 28.923,59.943 C113.1@29.386,60.406 v2(29.386,59.869) ; U15.7@29.673,57.181 30.443,57.181 C116.1@30.575,57.049 31.013,57.049 v2(31.14,56.921)
  Top Layer w0.508: U1.5@28.895,49.174 C4.2@28.895,50.448 ; C4.2@28.968,50.521 v2(28.968,51.117)
  other v1: 28.499,50.622 30.581,52.68 31.14,53.162
3.3Source: C6.2 C60.1 C61.1 C63.1 C64.1 C66.1 FB6.1 R12.1 U3.5 U10.7 U10.11 U10.15 U10.26 U10.37 | length 13.1
  Top Layer w0.178: 26.794,8.512 26.904,8.401 28.696,8.401 28.794,8.5 U10.11@28.794,8.893
  Top Layer w0.203: v2(21.412,6.147) 21.488,6.223 22.25,6.223 22.568,5.905 C63.1@22.568,5.626 U10.26@23.528,5.626 ; C60.1@26.75,9.627 26.794,9.583 U10.15@26.794,8.893 26.794,8.512 ; U10.37@27.294,2.893 27.294,2.551 27.754,2.091 C66.1@27.754,1.609 28.084,1.609 v2(28.346,1.346) ; U10.11@28.794,8.893 28.794,9.211 29.21,9.627 C64.1@29.519,9.627 29.519,9.987 v2(29.642,10.109) ; U10.7@29.544,6.643 31.101,6.643 v2(31.191,6.553)
  Top Layer w0.381: U3.5@18.872,3.566 C6.2@20.145,3.566
  other v1: 20.548,3.175 32,3.8 20.498,3.912 31.4,4 20.98,7.468 20.447,7.874
3.6V: C7.2 C8.2 C9.2 C10.2 P1.1 P1.2 P1.40 P1.41 R1.2 R2.2 R3.2 | length 62.7
  Top Layer w0.762: R2.2@23.229,29.87 24.231,29.87 25.904,28.198 29.196,28.198 30.798,29.8 R1.2@30.798,43.866
  Bottom Layer w0.508: P1.1@6.256,25.97 6.256,23.868 6.756,23.368 ; P1.1@6.3,26 C9.2@6.3,27.267 ; C7.2@6.731,19.673 P1.41@6.731,20.949 ; P1.41@6.756,20.97 6.756,23.368 ; P1.2@7.256,25.97 7.256,23.808 ; P1.2@7.3,26 C8.2@7.3,27.251 ; C10.2@7.747,19.8 P1.40@7.747,20.947 ; P1.40@7.756,20.97 7.756,23.308 7.256,23.808 ; 6.756,23.368 6.816,23.368 7.256,23.808
  Bottom Layer w0.762: P1.41@6.756,20.97 6.751,20.97 6.731,20.949 6.359,20.578 6.145,20.578 3.306,17.738 3.306,9.572 9.474,3.404 v2(11.455,3.404)
  other v1: 25.882,28.27 25.374,28.753 24.943,29.235 31.166,43.383 31.191,44.069
  other v4: 7.874,27.305 6.35,27.559 7.112,27.559
5.5V: C11.2 C12.2 C128.2 C129.2 P2.10 P2.11 P2.12 P2.13 R34.2 | length 12.7
  Bottom Layer w0.508: v1(15.595,39.395) 16.317,39.395 16.916,38.797 16.916,36.677 ; P2.11@16.416,33.797 16.408,33.804 16.408,36.17 16.916,36.677 ; P2.10@17.416,33.797 17.416,36.212 ; P2.13@17.916,38.797 17.916,36.712 17.416,36.212 ; 16.916,36.677 16.951,36.677 17.416,36.212
  other v1: 16.23,39.37
  other v4: 17.018,33.782 17.018,34.417 17.018,35.179 17.018,37.592 17.018,38.608 17.018,39.243
5V-A: C121.1 C124.2 C126.2 C127.2 FB1.1 R13.1 R14.1 R23.1 R27.1 R36.1 U11.1 U11.2 U16.11 | length 8.6
  Top Layer w0.254: U11.2@14.239,47.139 14.239,47.754 C127.2@14.664,48.179 ; C127.2@14.795,48.048 R36.1@14.795,50.465 C121.1@14.795,51.354 ; U11.1@14.889,47.139 C127.2@14.889,47.954 ; v1(15.037,48.235) 15.756,48.235 R27.1@16.34,47.65 ; v2(21.437,42.57) 21.606,42.739 C124.2@22.216,42.739 ; C124.2@22.144,42.811 U16.11@22.144,43.673
  other v1: 31.343,27.864 30.607,27.94 15.037,48.971 15.011,49.632 19.304,51.054 21.234,52.375 20.599,53.264 30.988,69.317 31.013,70.231
250M: C35.2 U7.24 | length 9
  Top Layer w0.33: C35.2@3.268,8.855 2.242,9.88 cw(c4.038,11.677) 1.498,11.677 1.498,13.527 cw(c4.038,13.527) 2.242,15.324 2.788,15.869 cw(c3.592,15.064) U7.24@3.592,16.202
500M: C34.2 U7.2 | length 10.7
  Top Layer w0.33: 4.841,15.127 ccw(c4.612,15.149) 4.842,15.149 ; U7.2@4.842,15.452 4.842,15.293 cw(c4.732,15.293) 4.842,15.289 4.842,15.149 ; C34.2@12.945,11.395 ccw(c11.941,10.391) 11.941,11.811 7.58,11.811 cw(c7.58,14.351) 5.784,12.555 5.586,12.752 cw(c7.382,14.548) 4.842,14.548 4.842,15.149
900M: C33.2 U7.4 | length 5.3
  Top Layer w0.33: U7.4@5.842,15.452 5.842,15.166 ccw(c6.708,15.166) 6.096,14.554 ccw(c7.283,15.741) 7.283,14.062 C33.2@10.278,14.062
1800M: C30.2 U7.15 | length 3.7
  Top Layer w0.33: U7.15@5.842,19.452 5.842,19.53 cw(c5.953,19.53) 5.857,19.584 5.857,19.732 ccw(c5.026,19.732) 5.856,19.756 cw(c6.577,19.756) 6.067,20.266 cw(c7.585,18.749) 7.585,20.895 C30.2@8.754,20.895
3600M: C31.2 U7.17 | length 11.3
  Top Layer w0.33: U7.17@4.842,19.452 4.842,20.605 cw(c7.382,20.605) 5.586,22.401 6.13,22.945 cw(c7.926,21.149) 7.926,23.689 C31.2@13.326,23.689
6000M: C29.2 U7.19 | length 11.7
  Top Layer w0.33: U7.19@3.592,18.702 cw(c5.214,20.324) 2.921,20.324 2.921,23.103 cw(c5.461,23.103) 3.665,24.899 4.25,25.485 cw(c6.046,23.689) 6.046,26.229 C29.2@8.373,26.229
DETO: R16.2 U14.11 | length 1.1
  Top Layer w0.254: R16.2@21.509,71.089 21.84,70.758 U14.11@21.84,70.106
dummy1: Y4.6
dummy2: Y5.6
dummy3: Y5.2
dummy4: Y4.2